# EAGLE board CrimeaLight (EAGLE 8.2.0)
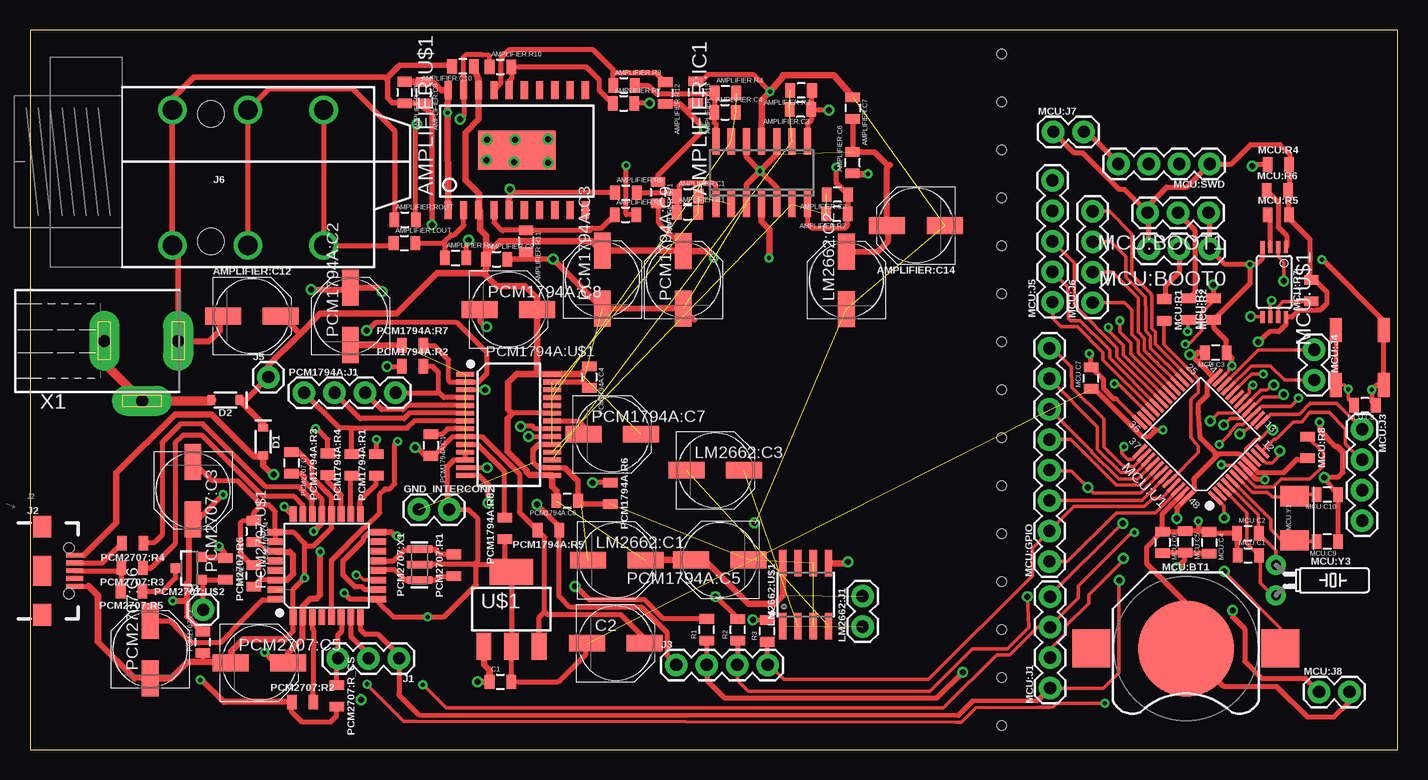
[diagram p0: board, top side]
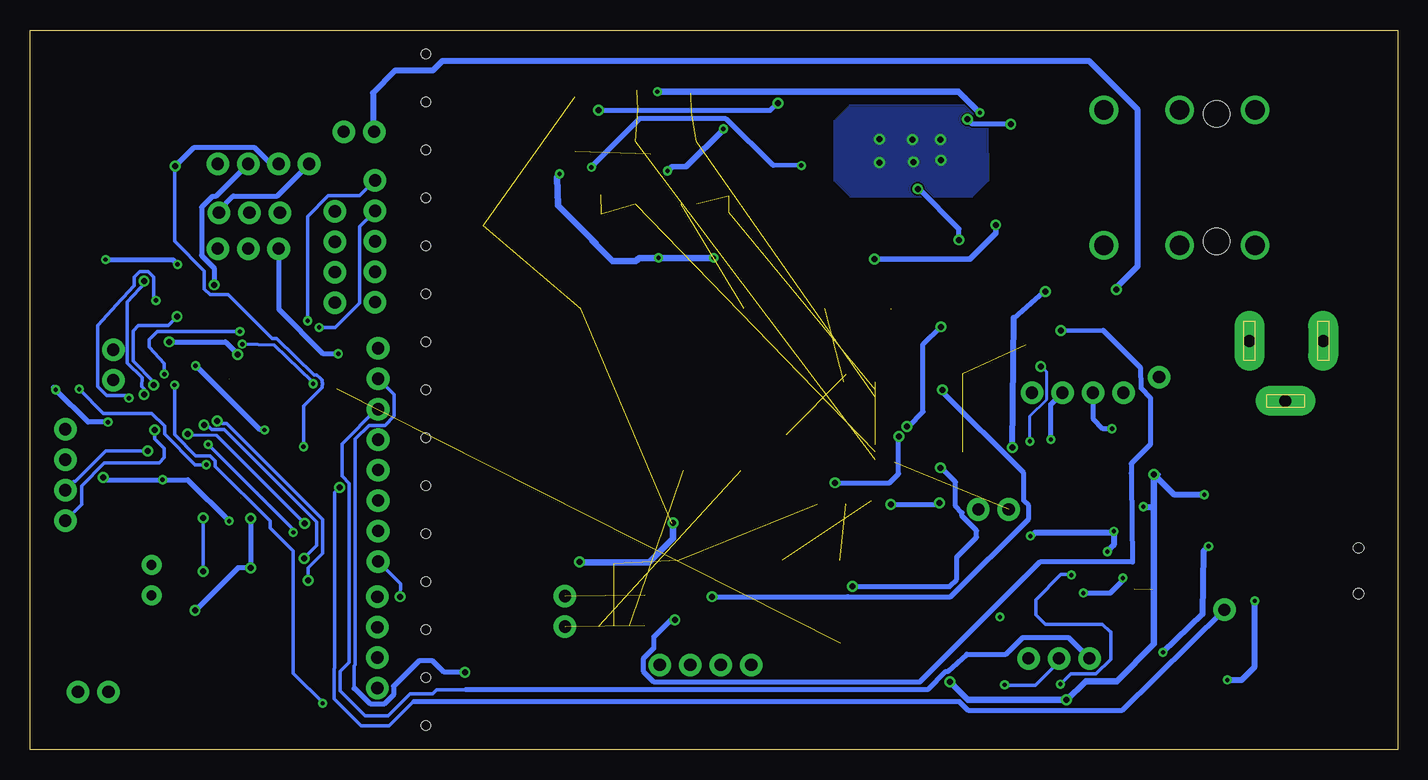
[diagram p1: board, bottom side, seen from below]

Size 114 x 60 mm. Coordinates in mm from the lower left corner, seen from the top.
Outline: 0,0 114,0 114,60 0,60 0,0
Copper layers (1*16): Top 0.035mm / dielectric 1.5mm / Bottom 0.035mm
Design rules "default *": minimum track width 0.3mm, minimum drill 0.3mm, track to track 0.1mm, track to pad 0.1mm, pad to pad 0.1mm, via to via 0.1mm, smd to smd 0.1mm, copper to edge 2mm, drill to drill 8mil, minimum pad ring 10mil, minimum via ring 8mil, stop-mask expansion 4mil, vias tented up to drill 0mil, thermal gap 10mil
Net classes: 0 default: width 0.3 mm; 1 GND: width 0.4 mm, drill 0.6 mm; 2 DGND: width 0.4 mm, drill 0.4 mm; 3 POWER: width 0.4 mm, drill 0.6 mm
Holes 0.8 mm at 81,2 81,6 81,10 81,14 81,18 81,22 81,26 81,30 81,34 81,38 81,42 81,46 81,50 81,54 81,58

## Footprints (pad centres in the part's own frame; a part is rotated, then mirrored left to right if it is on the bottom)
0805 = smd 0.8 x 1.2: 1 -0.9,0; 2 0.9,0
PANASONIC_D = smd 3 x 1.4: + 2.4,0; - -2.4,0
SO14 = smd 0.6 x 2.2: 1 -3.81,-2.6; 2 -2.54,-2.6; 3 -1.27,-2.6; 4 0,-2.6; 5 1.27,-2.6; 6 2.54,-2.6; 7 3.81,-2.6; 8 3.81,2.6; 9 2.54,2.6; 10 1.27,2.6; 11 0,2.6; 12 -1.27,2.6; 13 -2.54,2.6; 14 -3.81,2.6
SOIC20S = smd 0.6 x 1.5: 1 -5.715,-5; 2 -4.445,-5; 3 -3.175,-5; 4 -1.905,-5; 5 -0.635,-5; 6 0.635,-5; 7 1.905,-5; 8 3.175,-5; 9 4.445,-5; 10 5.715,-5; 11 5.715,5; 12 4.445,5; 13 3.175,5; 14 1.905,5; 15 0.635,5; 16 -0.635,5; 17 -1.905,5; 18 -3.175,5; 19 -4.445,5; 20 -5.715,5 | smd 6.452 x 3.251: P$1 0,0
SOD-323 = smd 0.63 x 0.83: A 1.15,0; C -1.15,0
1X02 = drill 1.016 pad 1.88: 1 0,0; 2 2.54,0
1X03 = drill 1.016 pad 1.88: 1 0,0; 2 2.54,0; 3 5.08,0
USB-AB-MICRO-SMD = smd 1.4 x 0.4: D+1 2.7,0; D-1 2.7,0.65; GND1 2.7,-1.3; ID1 2.7,-0.65; VBUS1 2.7,1.3 | smd 1.5 x 1.8: SHLD1 0,-3.68; SHLD2 0,3.68 | smd 1.5 x 2.5: SHLD3 0,0 | hole 0.85: 2.2,1.9; 2.2,-1.9
1X04 = drill 1.016 pad 1.88: 1 0,0; 2 2.54,0; 3 5.08,0; 4 7.62,0
1X01 = drill 1.016 pad 1.88: 1 0,0
AUDIO_JACK_0.25"_TRS_PTH_RA = drill 1.6: RING 10.5,-6.95; RING-NORM 10.5,4.35; SLEEVE 4.2,-6.95; SLEEVE-NORM 4.2,4.35; TIP 16.8,-6.95; TIP-NORM 16.8,4.35 | hole 2.2: 7.4,4; 7.4,-6.6
SOIC-8 = smd 0.61 x 2.21: 1 -1.905,-2.616; 2 -0.635,-2.616; 3 0.635,-2.616; 4 1.905,-2.616; 5 1.905,2.616; 6 0.635,2.616; 7 -0.635,2.616; 8 -1.905,2.616
BATTCON_12MM = smd 8 x 8: GND 0,0 | smd 3.175 x 3.175: PWR@1 -7.874,0; PWR@2 7.874,0
1X08 = drill 1.016 pad 1.88: 1 0,0; 2 2.54,0; 3 5.08,0; 4 7.62,0; 5 10.16,0; 6 12.7,0; 7 15.24,0; 8 17.78,0
1X05 = drill 1.016 pad 1.88: 1 0,0; 2 2.54,0; 3 5.08,0; 4 7.62,0; 5 10.16,0
LQFP48-0.5-7X7MM = smd 1.5 x 0.3: 1 -4.45,2.75; 2 -4.45,2.25; 3 -4.45,1.75; 4 -4.45,1.25; 5 -4.45,0.75; 6 -4.45,0.25; 7 -4.45,-0.25; 8 -4.45,-0.75; 9 -4.45,-1.25; 10 -4.45,-1.75; 11 -4.45,-2.25; 12 -4.45,-2.75; 25 4.45,-2.75; 26 4.45,-2.25; 27 4.45,-1.75; 28 4.45,-1.25; 29 4.45,-0.75; 30 4.45,-0.25; 31 4.45,0.25; 32 4.45,0.75; 33 4.45,1.25; 34 4.45,1.75; 35 4.45,2.25; 36 4.45,2.75 | smd 0.3 x 1.5: 13 -2.75,-4.45; 14 -2.25,-4.45; 15 -1.75,-4.45; 16 -1.25,-4.45; 17 -0.75,-4.45; 18 -0.25,-4.45; 19 0.25,-4.45; 20 0.75,-4.45; 21 1.25,-4.45; 22 1.75,-4.45; 23 2.25,-4.45; 24 2.75,-4.45; 37 2.75,4.45; 38 2.25,4.45; 39 1.75,4.45; 40 1.25,4.45; 41 0.75,4.45; 42 0.25,4.45; 43 -0.25,4.45; 44 -0.75,4.45; 45 -1.25,4.45; 46 -1.75,4.45; 47 -2.25,4.45; 48 -2.75,4.45
TSSOP8 = smd 0.35 x 1: 1 -0.975,-2.925; 2 -0.325,-2.925; 3 0.325,-2.925; 4 0.975,-2.925; 5 0.975,2.925; 6 0.325,2.925; 7 -0.325,2.925; 8 -0.975,2.925
PUSHBUTTON_4X4 = smd 1 x 2: P$1 2,2.3; P$2 2,-2.3; P$3 -2,-2.3; P$4 -2,2.3
CRYSTAL-TXC-7A = smd 1.7 x 2.4: P$1 1.85,0; P$2 -1.85,0
CRYSTAL-PTH-2X6-CYL-KIT = drill 0.813 pad 1.676: 1 -1.27,0; 2 1.27,0
SSOP28-0.65-10.2X5.2MM = smd 0.4 x 1.5: 1 -4.225,-3.625; 2 -3.575,-3.625; 3 -2.925,-3.625; 4 -2.275,-3.625; 5 -1.625,-3.625; 6 -0.975,-3.625; 7 -0.325,-3.625; 8 0.325,-3.625; 9 0.975,-3.625; 10 1.625,-3.625; 11 2.275,-3.625; 12 2.925,-3.625; 13 3.575,-3.625; 14 4.225,-3.625; 15 4.225,3.625; 16 3.575,3.625; 17 2.925,3.625; 18 2.275,3.625; 19 1.625,3.625; 20 0.975,3.625; 21 0.325,3.625; 22 -0.325,3.625; 23 -0.975,3.625; 24 -1.625,3.625; 25 -2.275,3.625; 26 -2.925,3.625; 27 -3.575,3.625; 28 -4.225,3.625
TQFP32-0.8-7X7MM = smd 1.27 x 0.559: 1 -4.293,2.8; 2 -4.293,2; 3 -4.293,1.2; 4 -4.293,0.4; 5 -4.293,-0.4; 6 -4.293,-1.2; 7 -4.293,-2; 8 -4.293,-2.8; 17 4.293,-2.8; 18 4.293,-2; 19 4.293,-1.2; 20 4.293,-0.4; 21 4.293,0.4; 22 4.293,1.2; 23 4.293,2; 24 4.293,2.8 | smd 0.559 x 1.27: 9 -2.8,-4.293; 10 -2,-4.293; 11 -1.2,-4.293; 12 -0.4,-4.293; 13 0.4,-4.293; 14 1.2,-4.293; 15 2,-4.293; 16 2.8,-4.293; 25 2.8,4.293; 26 2,4.293; 27 1.2,4.293; 28 0.4,4.293; 29 -0.4,4.293; 30 -1.2,4.293; 31 -2,4.293; 32 -2.8,4.293
SOT23-3 = smd 0.8 x 0.9: 1 -0.95,-1; 2 0.95,-1; 3 0,1.1
RESONATOR-SMD-3.2X1.3 = smd 0.61 x 2.184: 1 -1.283,-0.006; 2 0,0; 3 1.27,-0.006
SOT223 = smd 1.219 x 2.235: 1 -2.311,-3.099; 2 0,-3.099; 3 2.311,-3.099 | smd 3.6 x 2.2: 4 0,3.099
733980-62 = drill 1 pad 2.5 long: 1 0,8.57; 2 0,2.42; 3 5,5.57

## Placement (x,y rotation side)
AMPLIFIER:C1  2.7nF  [0805]  54.83,46.13 0 top
AMPLIFIER:C2  2.7nF  [0805]  67.3,46.27 180 top
AMPLIFIER:C3  2.7nF  [0805]  64.23,53.37 180 top
AMPLIFIER:C4  2.7nF  [0805]  57.94,53.13 0 top
AMPLIFIER:C5  0.1uF  [0805]  31.23,54.79 270 top
AMPLIFIER:C6  0.1uF  [0805]  68.56,48.94 90 top
AMPLIFIER:C7  0.1uF  [0805]  68.59,53.49 270 top
AMPLIFIER:C8  10uF  [0805]  32.79,54.77 270 top
AMPLIFIER:C9  0.1uF  [0805]  38.9,40.89 0 top
AMPLIFIER:C10  10uF  [0805]  36.09,56.97 180 top
AMPLIFIER:C11  0.1uF  [0805]  52.35,46.45 270 top
AMPLIFIER:C12  10uF  [PANASONIC_D]  18.5,36.15 0 top
AMPLIFIER:C13  0.1uF  [0805]  55.5,54.8 270 top
AMPLIFIER:C14  10uF  [PANASONIC_D]  73.85,43.7 180 top
AMPLIFIER:IC1  OPA4134D  [SO14]  60.99,48.1 0 top
AMPLIFIER:LOUT  37,8  [0805]  31.21,42.23 0 top
AMPLIFIER:R1  1K  [0805]  54.82,44.79 0 top
AMPLIFIER:R2  1K  [0805]  67.26,44.66 180 top
AMPLIFIER:R3  1K  [0805]  64.29,54.96 180 top
AMPLIFIER:R4  1K  [0805]  57.98,54.74 0 top
AMPLIFIER:R5  1K  [0805]  49.65,44.59 0 top
AMPLIFIER:R6  1K  [0805]  49.67,46.44 0 top
AMPLIFIER:R7  1K  [0805]  49.49,53.89 0 top
AMPLIFIER:R8  1K  [0805]  49.51,55.39 0 top
AMPLIFIER:R9  1K  [0805]  35.48,40.99 0 top
AMPLIFIER:R10  1K  [0805]  39.21,56.93 0 top
AMPLIFIER:R11  1K  [0805]  41.35,42.4 270 top
AMPLIFIER:R12  1K  [0805]  52.95,54.75 270 top
AMPLIFIER:ROUT  37,8  [0805]  31.26,44.18 0 top
AMPLIFIER:U$1  TPA6120A2  [SOIC20S]  40.58,49.99 0 top
C1  1.5uF  [0805]  39.21,5.65 0 top
C2  220uF  [PANASONIC_D]  48.82,8.87 0 top
D1  0.5A/20V/420mV  [SOD-323]  19.45,25.67 270 top
D2  1A/20V/420mV  [SOD-323]  16.29,29.15 180 top
GND_INTERCONN  GNDCONNECTOR  [1X02]  32.41,20.02 0 top
J1  SPI  [1X03]  30.76,7.6 180 top
J2  USB_MICRO  [USB-AB-MICRO-SMD]  1.04,14.91 0 top
J3  SWITCHERS  [1X04]  53.88,7.05 0 top
J4  PULLUP_HANDLE  [1X01]  14.43,11.65 0 top
J5  V+  [1X01]  19.87,31.05 0 top
J6  HEADPHONES  [AUDIO_JACK_0.25"_TRS_PTH_RA]  7.67,48.99 0 top
LM2662:C1  150nF  [PANASONIC_D]  48.9,15.79 0 top
LM2662:C2  47uF  [PANASONIC_D]  68.06,39.14 90 top
LM2662:C3  47uF  [PANASONIC_D]  57.13,23.29 0 top
LM2662:J1  20/150Khz  [1X02]  69.4,10.25 90 top
LM2662:U$1  LM2662  [SOIC-8]  64.66,12.91 0 top
MCU:BOOT0  [1X03]  98.35,41.76 180 top
MCU:BOOT1  [1X03]  98.25,44.76 180 top
MCU:BT1  [BATTCON_12MM]  96.36,8.43 180 top
MCU:C1  22pF  [0805]  101.55,16.19 0 top
MCU:C2  22pF  [0805]  101.54,18.04 0 top
MCU:C3  1uF  [0805]  98.84,33.1 180 top
MCU:C4  1uF  [0805]  98.3,17.25 270 top
MCU:C5  1uF  [0805]  96.3,17.31 270 top
MCU:C6  1uF  [0805]  94.4,17.27 270 top
MCU:C7  1uF  [0805]  88.45,30.97 90 top
MCU:C8  22pF  [0805]  111.29,28.7 180 top
MCU:C9  22pF  [0805]  108.15,17.35 180 top
MCU:C10  22pF  [0805]  108.14,21.26 180 top
MCU:GPIO  GPIO  [1X08]  84.98,15.68 90 top
MCU:J1  SPI1  [1X04]  85.04,5.12 90 top
MCU:J3  USART2  [1X04]  111.06,26.71 270 top
MCU:J4  I2C_2  [1X02]  107.06,33.34 270 top
MCU:J5  USART1  [1X05]  85.24,37.3 90 top
MCU:J6  SPI2  [1X04]  88.59,37.26 90 top
MCU:J7  POWER  [1X02]  85.31,51.51 0 top
MCU:J8  POWER  [1X02]  107.46,4.81 0 top
MCU:R1  100K  [0805]  94.54,36.66 270 top
MCU:R2  100K  [0805]  96.59,36.72 270 top
MCU:R3  10K  [0805]  98.66,36.72 90 top
MCU:R4  10K  [0805]  104.06,48.79 0 top
MCU:R5  100K  [0805]  104.05,44.59 0 top
MCU:R6  100K  [0805]  103.99,46.64 0 top
MCU:R7  100K  [0805]  106.81,38.28 90 top
MCU:R8  100K  [0805]  106.49,25.18 270 top
MCU:SWD  DEBUG  [1X04]  98.35,48.83 180 top
MCU:U1  STM32F103CBT6-LQFP48  [LQFP48-0.5-7X7MM]  97.62,26.08 135 top
MCU:U$1  M95320-D  [TSSOP8]  103.72,38.99 180 top
MCU:U$2  PUSHBUTTON  [PUSHBUTTON_4X4]  110.85,32.69 180 top
MCU:Y1  16 Mhz  [CRYSTAL-TXC-7A]  105.41,19.29 90 top
MCU:Y3  32.768kHz  [CRYSTAL-PTH-2X6-CYL-KIT]  103.87,14.12 270 top
PCM1794A:C1  0.1uF  [0805]  33.42,25.38 270 top
PCM1794A:C2  10uF  [PANASONIC_D]  26.71,36.14 90 top
PCM1794A:C3  10uF  [PANASONIC_D]  47.71,39.19 90 top
PCM1794A:C4  0.1uF  [0805]  46.62,31.06 270 top
PCM1794A:C5  10uF  [PANASONIC_D]  57.51,15.81 180 top
PCM1794A:C6  0.1uF  [0805]  44.79,20.73 180 top
PCM1794A:C7  47uF  [PANASONIC_D]  48.54,26.29 0 top
PCM1794A:C8  47uF  [PANASONIC_D]  39.89,36.69 0 top
PCM1794A:C9  10uF  [PANASONIC_D]  54.46,39.16 90 top
PCM1794A:J1  I2S  [1X04]  22.85,29.75 0 top
PCM1794A:R1  27  [0805]  28.88,23.74 90 top
PCM1794A:R2  27  [0805]  31.89,31.97 0 top
PCM1794A:R3  27  [0805]  24.83,23.79 90 top
PCM1794A:R4  27  [0805]  26.83,23.74 90 top
PCM1794A:R5  27  [0805]  43.21,18.28 180 top
PCM1794A:R6  10K  [0805]  48.37,21.36 270 top
PCM1794A:R7  100K  [0805]  31.89,33.72 0 top
PCM1794A:R8  100K  [0805]  39.58,18.44 90 top
PCM1794A:U$1  PCM1794A  [SSOP28-0.65-10.2X5.2MM]  39.91,27.07 270 top
PCM2707:C1  1uF  [0805]  18.65,14.49 90 top
PCM2707:C2  1uF  [0805]  14.4,8.95 90 top
PCM2707:C3  0.1uF  [PANASONIC_D]  13.59,21.6 270 top
PCM2707:C4  1uF  [0805]  18.65,18.19 270 top
PCM2707:C5  10uF  [PANASONIC_D]  19.12,7.24 0 top
PCM2707:C6  10uF  [PANASONIC_D]  10.01,8.34 90 top
PCM2707:C7  1uF  [0805]  21.8,23.9 270 top
PCM2707:R1  1M  [0805]  35.33,15.37 90 top
PCM2707:R2  1M  [0805]  22.72,3.97 0 top
PCM2707:R3  22  [0805]  8.51,15.15 180 top
PCM2707:R4  22  [0805]  8.56,17.2 180 top
PCM2707:R5  1.5K  [0805]  8.46,13.2 180 top
PCM2707:R6  1M  [0805]  16.3,15.06 270 top
PCM2707:R_CS  100k  [0805]  25.57,4.48 270 top
PCM2707:U$1  PCM2707  [TQFP32-0.8-7X7MM]  24.74,15.33 90 top
PCM2707:U$2  IRLML2246TRPBF  [SOT23-3]  13.29,15.11 90 top
PCM2707:X1  12MHz CSTCE12MOG52-R0  [RESONATOR-SMD-3.2X1.3]  32.48,15.42 90 top
R1  20  [0805]  56.4,10 90 top
R2  20  [0805]  59,9.99 90 top
R3  20  [0805]  61.45,9.88 90 top
U$1  LM3940IMP-3.3/NOPB  [SOT223]  40.13,11.71 0 top
X1  EXT_+5V  [733980-62]  3.77,34.07 270 top

## Library data of the parts
AMPLIFIER:C1-AMPLIFIER:C11 AMPLIFIER:C13 AMPLIFIER:LOUT AMPLIFIER:R1-AMPLIFIER:R12 AMPLIFIER:ROUT C1 C2 LM2662:C1-LM2662:C3 MCU:C1-MCU:C10 PCM1794A:C1-PCM1794A:C9 PCM2707:C1-PCM2707:C7 R1-R3 = SparkFun-Passives
AMPLIFIER:C12 AMPLIFIER:C14 = SparkFun-Capacitors; PROD_ID: CAP-12547
AMPLIFIER:IC1 = linear
AMPLIFIER:U$1 LM2662:U$1 MCU:U$1 MCU:U$2 PCM1794A:U$1 PCM2707:U$1 PCM2707:U$2 U$1 = EduAreaLib
D1 D2 = SparkFun-DiscreteSemi; PROD_ID: DIO-10955
GND_INTERCONN J1 J4 J5 LM2662:J1 MCU:J4 MCU:J5 MCU:J7 MCU:J8 = SparkFun-Connectors
J2 = SparkFun-Connectors; PROD_ID: CONN-11794
J3 MCU:J1 MCU:J3 MCU:J6 MCU:SWD PCM1794A:J1 = SparkFun-Connectors; PROD_ID: CONN-09696
J6 = SparkFun-Connectors; PROD_ID: CONN-12339; SF_ID: COM-11144
MCU:BOOT0 MCU:BOOT1 = SparkFun-Retired
MCU:BT1 = SparkFun-Batteries; PROD_ID: BATT-08044; SF_SKU: PRT-10592
MCU:GPIO = SparkFun-Connectors; PROD_ID: CONN-08438
MCU:R1-MCU:R8 PCM1794A:R1-PCM1794A:R8 PCM2707:R1-PCM2707:R6 PCM2707:R_CS = SparkFun-Resistors
MCU:U1 = Seeed-OPL-ic; MPN: STM32F103CBT6
MCU:Y1 = SparkFun-FreqCtrl
MCU:Y3 = SparkFun-Clocks; PROD_ID: XTAL-10112
PCM2707:X1 = SparkFun-Clocks; PROD_ID: XTAL-08895
X1 = con-conrad

## Nets
!MUTE!: MCU:GPIO.3 MCU:U1.43
!PCM2702_CS!: J1.3 MCU:GPIO.6 MCU:U1.40 PCM2707:R_CS.1 PCM2707:U$1.6
!PGA4311_CS!: MCU:U1.19
!RST!: J3.1 PCM1794A:R5.1 PCM1794A:U$1.14
!SSPND!: MCU:U1.18 PCM2707:U$1.11
+3.3V: C2.+ MCU:BOOT0.3 MCU:BOOT1.3 MCU:C3.2 MCU:C4.2 MCU:C5.2 MCU:C6.2 MCU:C7.2 MCU:J7.1 MCU:J8.1 MCU:R4.2 MCU:R5.2 MCU:R6.2 MCU:R7.2 MCU:R8.2 MCU:SWD.1 MCU:U1.9 MCU:U1.24 MCU:U1.36 MCU:U1.48 MCU:U$1.8 PCM1794A:C1.2 PCM1794A:C2.+ PCM1794A:R5.2 PCM1794A:U$1.9 U$1.3
AMPLIFIER:N$2: AMPLIFIER:R6.1 AMPLIFIER:R9.2 AMPLIFIER:U$1.5
AMPLIFIER:N$3: AMPLIFIER:R5.1 AMPLIFIER:R11.1 AMPLIFIER:U$1.4
AMPLIFIER:N$5: AMPLIFIER:R7.1 AMPLIFIER:R10.2 AMPLIFIER:U$1.16
AMPLIFIER:N$6: AMPLIFIER:R8.1 AMPLIFIER:R12.1 AMPLIFIER:U$1.17
AMPLIFIER:N$8: AMPLIFIER:LOUT.2 AMPLIFIER:R9.1 AMPLIFIER:U$1.2
AMPLIFIER:N$9: AMPLIFIER:R10.1 AMPLIFIER:ROUT.2 AMPLIFIER:U$1.19
AMPLIFIER:OUTA: AMPLIFIER:C1.1 AMPLIFIER:IC1.1 AMPLIFIER:R1.1 AMPLIFIER:R6.2
AMPLIFIER:OUTB: AMPLIFIER:C2.1 AMPLIFIER:IC1.7 AMPLIFIER:R2.1 AMPLIFIER:R5.2
AMPLIFIER:OUTC: AMPLIFIER:C3.1 AMPLIFIER:IC1.8 AMPLIFIER:R3.1 AMPLIFIER:R7.2
AMPLIFIER:OUTD: AMPLIFIER:C4.1 AMPLIFIER:IC1.14 AMPLIFIER:R4.1 AMPLIFIER:R8.2
CHSL: PCM1794A:R7.2 PCM1794A:U$1.2 R3.2
DEM: PCM1794A:U$1.3 R2.2
DGND [GND]: C1.2 C2.- GND_INTERCONN.2 J2.GND1 MCU:BOOT0.1 MCU:BOOT1.1 MCU:BT1.GND MCU:C1.1 MCU:C2.1 MCU:C3.1 MCU:C4.1 MCU:C5.1 MCU:C6.1 MCU:C7.1 MCU:C8.1 MCU:C9.1 MCU:C10.1 MCU:J7.2 MCU:J8.2 MCU:R3.1 MCU:SWD.4 MCU:U1.8 MCU:U1.23 MCU:U1.35 MCU:U1.47 MCU:U$1.4 MCU:U$2.P$3 MCU:U$2.P$4 PCM1794A:C1.1 PCM1794A:C2.- PCM1794A:R7.1 PCM1794A:R8.1 PCM1794A:U$1.1 PCM1794A:U$1.8 PCM1794A:U$1.11 PCM1794A:U$1.12 PCM2707:C1.2 PCM2707:C2.1 PCM2707:C3.- PCM2707:C4.1 PCM2707:C5.- PCM2707:C6.- PCM2707:C7.1 PCM2707:U$1.1 PCM2707:U$1.9 PCM2707:U$1.20 PCM2707:U$1.25 PCM2707:U$1.26 PCM2707:U$1.31 PCM2707:X1.2 U$1.2 U$1.4
EXT+5V: D2.A X1.2 X1.3
GND [GND]: AMPLIFIER:C5.2 AMPLIFIER:C6.2 AMPLIFIER:C7.2 AMPLIFIER:C8.2 AMPLIFIER:C9.2 AMPLIFIER:C10.2 AMPLIFIER:C11.1 AMPLIFIER:C12.- AMPLIFIER:C13.2 AMPLIFIER:C14.+ AMPLIFIER:IC1.3 AMPLIFIER:IC1.5 AMPLIFIER:IC1.10 AMPLIFIER:IC1.12 AMPLIFIER:R11.2 AMPLIFIER:R12.2 GND_INTERCONN.1 J6.SLEEVE J6.SLEEVE-NORM LM2662:C1.- LM2662:C2.+ LM2662:U$1.3 LM2662:U$1.6 PCM1794A:C3.- PCM1794A:C4.2 PCM1794A:C5.- PCM1794A:C6.1 PCM1794A:C9.- PCM1794A:R6.2 PCM1794A:U$1.16 PCM1794A:U$1.19 PCM1794A:U$1.24 PCM1794A:U$1.27 X1.1
LM2662:FC: LM2662:J1.1 LM2662:U$1.1
LM2662:N$1: LM2662:C3.+ LM2662:U$1.2
LM2662:N$2: LM2662:C3.- LM2662:U$1.4
MCU:!EEPROM_CS!: MCU:R6.1 MCU:U$1.1
MCU:!EEPROM_HOLD!: MCU:R7.1 MCU:U$1.7
MCU:!RST!: MCU:C8.2 MCU:R8.1 MCU:U1.7 MCU:U$2.P$1 MCU:U$2.P$2
MCU:!W!: MCU:R5.1 MCU:U$1.3
MCU:I2C2_SCL: MCU:J4.2 MCU:U1.21
MCU:I2C2_SDA: MCU:J4.1 MCU:U1.22
MCU:N$1: MCU:BT1.PWR@1 MCU:U1.1
MCU:N$2: MCU:C10.2 MCU:U1.6 MCU:Y1.P$1
MCU:N$3: MCU:C9.2 MCU:U1.5 MCU:Y1.P$2
MCU:N$4: MCU:C2.2 MCU:U1.4 MCU:Y3.1
MCU:N$5: MCU:C1.2 MCU:U1.3 MCU:Y3.2
MCU:N$6: MCU:J5.3 MCU:U1.31
MCU:N$7: MCU:BOOT0.2 MCU:R1.1
MCU:N$8: MCU:R1.2 MCU:U1.44
MCU:N$9: MCU:J5.2 MCU:U1.32
MCU:N$10: MCU:BOOT1.2 MCU:R2.1
MCU:N$11: MCU:R2.2 MCU:U1.20
MCU:N$12: MCU:J5.1 MCU:U1.33
MCU:N$14: MCU:J5.4 MCU:U1.30
MCU:N$15: MCU:J5.5 MCU:U1.29
MCU:PA15: MCU:GPIO.8 MCU:U1.38
MCU:SPI1_MISO: MCU:J1.2 MCU:U1.16 MCU:U$1.2
MCU:SPI1_NSS: MCU:J1.4 MCU:U1.14
MCU:SPI2_MISO: MCU:J6.2 MCU:U1.27
MCU:SPI2_MOSI: MCU:J6.1 MCU:U1.28
MCU:SPI2_NSS: MCU:J6.4 MCU:U1.25
MCU:SPI2_SCK: MCU:J6.3 MCU:U1.26
MCU:SWDCLK: MCU:R4.1 MCU:SWD.3 MCU:U1.37
MCU:SWDIO: MCU:R3.2 MCU:SWD.2 MCU:U1.34
MCU:USART2_CTS: MCU:J3.4 MCU:U1.10
MCU:USART2_RTS: MCU:J3.3 MCU:U1.11
MCU:USART2_RX: MCU:J3.1 MCU:U1.13
MCU:USART2_TX: MCU:J3.2 MCU:U1.12
MCU:ZERO: MCU:U1.2
N$1: J2.D-1 PCM2707:R4.2
N$2: J2.D+1 PCM2707:R3.2 PCM2707:R5.2
N$3: AMPLIFIER:C1.2 AMPLIFIER:IC1.2 AMPLIFIER:R1.2 PCM1794A:U$1.26
N$4: AMPLIFIER:LOUT.1 J6.TIP J6.TIP-NORM
N$5: PCM1794A:R4.1 PCM2707:U$1.18
N$6: PCM1794A:R2.1 PCM2707:U$1.5
N$7: PCM1794A:R3.1 PCM2707:U$1.19
N$8: PCM1794A:R1.1 PCM2707:U$1.17
N$9: AMPLIFIER:ROUT.1 J6.RING J6.RING-NORM
N$10: AMPLIFIER:C4.2 AMPLIFIER:IC1.13 AMPLIFIER:R4.2 PCM1794A:U$1.25
N$11: J3.2 MCU:GPIO.7 MCU:U1.39 R1.1
N$12: J3.3 MCU:GPIO.1 MCU:U1.46 R2.1
N$13: J3.4 MCU:GPIO.2 MCU:U1.45 R3.1
N$14: AMPLIFIER:C2.2 AMPLIFIER:IC1.6 AMPLIFIER:R2.2 PCM1794A:U$1.18
N$15: AMPLIFIER:C3.2 AMPLIFIER:IC1.9 AMPLIFIER:R3.2 PCM1794A:U$1.17
PCM1794A:BCK_INT: PCM1794A:J1.2 PCM1794A:R3.2 PCM1794A:U$1.6
PCM1794A:DATA_INT: PCM1794A:J1.3 PCM1794A:R1.2 PCM1794A:U$1.5
PCM1794A:LRCK_INT: PCM1794A:J1.4 PCM1794A:R2.2 PCM1794A:U$1.4
PCM1794A:MUTE: PCM1794A:R8.2 PCM1794A:U$1.10
PCM1794A:N$4: PCM1794A:R6.1 PCM1794A:U$1.20
PCM1794A:N$9: PCM1794A:C7.- PCM1794A:U$1.22
PCM1794A:N$10: PCM1794A:C8.- PCM1794A:U$1.21
PCM1794A:SCK_INT: PCM1794A:J1.1 PCM1794A:R4.2 PCM1794A:U$1.7
PCM2707:DIN: PCM2707:U$1.4
PCM2707:INT_3.3V: PCM2707:C5.+ PCM2707:C7.2 PCM2707:R6.1 PCM2707:U$1.2 PCM2707:U$1.10 PCM2707:U$1.16 PCM2707:U$1.21 PCM2707:U$2.2
PCM2707:INTRNL_D+: PCM2707:R3.1 PCM2707:U$1.23
PCM2707:INTRNL_D-: PCM2707:R4.1 PCM2707:U$1.22
PCM2707:INTRNL_HOST: PCM2707:R2.2 PCM2707:U$1.3
PCM2707:N$2: PCM2707:C1.1 PCM2707:C4.2 PCM2707:U$1.27 PCM2707:U$1.30
PCM2707:N$9: PCM2707:R5.1 PCM2707:U$2.3
PCM2707:RESONATOR_XTI: PCM2707:R1.1 PCM2707:U$1.12 PCM2707:X1.1
PCM2707:RESONATOR_XTO: PCM2707:R1.2 PCM2707:U$1.13 PCM2707:X1.3
PCM2707:VCOM: PCM2707:C6.+ PCM2707:U$1.32
PULLUP_D+: J4.1 MCU:GPIO.4 MCU:U1.42 PCM2707:R6.2 PCM2707:U$2.1
SPI_MOSI: J1.1 MCU:J1.1 MCU:U1.17 MCU:U$1.5 PCM2707:U$1.8
SPI_SCK: J1.2 MCU:J1.3 MCU:U1.15 MCU:U$1.6 PCM2707:U$1.7
USB+5V [POWER]: C1.1 D1.A J2.VBUS1 PCM2707:C2.2 PCM2707:C3.+ PCM2707:R2.1 PCM2707:R_CS.2 PCM2707:U$1.24 U$1.1
V+ [POWER]: AMPLIFIER:C6.1 AMPLIFIER:C9.1 AMPLIFIER:C10.1 AMPLIFIER:C11.2 AMPLIFIER:C12.+ AMPLIFIER:IC1.4 AMPLIFIER:U$1.3 AMPLIFIER:U$1.18 D1.C D2.C J5.1 LM2662:C1.+ LM2662:J1.2 LM2662:U$1.8 PCM1794A:C3.+ PCM1794A:C4.1 PCM1794A:C5.+ PCM1794A:C6.2 PCM1794A:C7.+ PCM1794A:C8.+ PCM1794A:C9.+ PCM1794A:U$1.15 PCM1794A:U$1.23 PCM1794A:U$1.28
V- [POWER]: AMPLIFIER:C5.1 AMPLIFIER:C7.1 AMPLIFIER:C8.1 AMPLIFIER:C13.1 AMPLIFIER:C14.- AMPLIFIER:IC1.11 AMPLIFIER:U$1.1 AMPLIFIER:U$1.20 LM2662:C2.- LM2662:U$1.5
ZCEN: MCU:GPIO.5 MCU:U1.41
ZERO: PCM1794A:U$1.13 R1.2

## Tracks (layer width: path | path; a pad name or v marks a point on that pad's centre or on a via)
!MUTE!
  Top 0.305: MCU:GPIO.3 92.68,20.76 94.65,22.73 MCU:U1.43
!PCM2702_CS!
  Top 0.305: MCU:U1.40 93.59,23.79 92.35,22.55 90.76,22.55 88.48,24.83 88.48,24.88 MCU:GPIO.6
  Top 0.406: PCM2707:U$1.6 26,10.98 26,9.9 25.68,9.58 J1.3 25.57,7.49 PCM2707:R_CS.1
  Bottom 0.305: 77.65,5 80.1,5 80.44,4.66 82.29,4.66 84.15,2.8 86.05,2.8 88.14,4.89 88.14,6.54 87.39,7.29 87.39,22.18 88,22.79 88,25.5 85.12,28.38 MCU:GPIO.6
  Bottom 0.406: 77.65,5 39.17,5 37.66,6.51 37.49,6.51 35.9,7.95 32.65,7.95 31.25,9.35 27.43,9.35 J1.3
!RST!  (via drill 0.5)
  Top 0.406: 42.2,20.5 v42.25,20.45 44.11,18.59 PCM1794A:R5.1 44.1,12.8 45.04,11.86 51.01,11.86 53.13,9.74 53.13,7.8 J3.1 | v38.2,20.55 38.2,22.1 37.45,22.85 PCM1794A:U$1.14
  Bottom 0.406: v42.25,20.45 38.15,20.45 38.15,20.5 v38.2,20.55
!SSPND!  (via drill 0.35)
  Top 0.305: MCU:U1.18 101.65,29.75 101.65,30.2 101.9,30.45 v101.95,30.4 | v89.6,3.85 85.6,3.85 85.3,3.54 85.06,3.54 84.02,3.54 78.83,3.49 77.96,2.62 | 77.96,2.62 | 77.96,2.62 77.8,2.45 77.63,2.29 77.4,2.29 77.17,2.29 32.17,2.34 31.16,2.34 28.05,5.45 v28.1,5.45 | PCM2707:U$1.11 27.82,14.13 27.35,14.6 27.25,14.6 v27.2,14.55
  Bottom 0.305: v101.95,30.4 101.95,26.26 100.18,24.48 99,24.48 98.57,24.05 98.57,23.62 94,19.05 94,18.5 92.05,16.55 92.05,6.35 89.5,3.8 89.55,3.8 v89.6,3.85 | v28.1,5.45 27.25,6.3 25.14,6.3 23.92,7.53 23.92,9.8 23.95,9.8 24.6,10.45 29.35,10.45 30.15,11.25 30.15,12.5 28.05,14.6 27.25,14.6 v27.2,14.55
+3.3V  (via drill 0.35, 0.5)  (1 unrouted)
  Top 0.3: 98.57,31.12 MCU:U1.24 | MCU:U1.36 90.55,29.25
  Top 0.305: 107.3,36.63 107.56,36.63 | MCU:U1.24
  Top 0.4: v32.1,25.2 32.05,25.45 32,25.45 32.97,24.48 PCM1794A:C1.2 33.63,24.48 35.24,26.09 PCM1794A:U$1.9 37.7,26.09 40.8,23 40.8,19.79 PCM1794A:R5.2 42.9,17.69 42.9,11.5 | U$1.3 42.44,11.04 42.9,11.5 | C2.+ 51.22,9.28 49.25,11.25 43.15,11.25 42.9,11.5 | MCU:U1.48 96.42,20.97 95.6,20.15 v95.6,19.27 95.6,18.97 | 95.8,15.35 v95.6,15.15 | 95.8,15.35 96.25,15.8 96.25,16.36 MCU:C5.2 | MCU:C5.2 94.44,16.41 MCU:C6.2 | MCU:C5.2 98.24,16.41 MCU:C4.2 | 95.95,15.2 95.8,15.35 | v100.25,11.6 100.25,11.05 101.25,10.05 101.25,7.35 102.65,5.95 106.32,5.95 MCU:J8.1 | MCU:BOOT1.3 91.23,46.7 90.8,46.7 87.75,49.75 87.07,49.75 MCU:J7.1 | MCU:BOOT1.3 93.17,45.32 94.75,46.9 96.42,46.9 MCU:SWD.1 100.13,48.83 101.75,50.45 104.2,50.45 105,49.65 105,48.83 MCU:R4.2 104.96,46.71 MCU:R6.2 104.89,44.65 MCU:R5.2 104.95,44.3 106.7,42.55 106.7,39.29 MCU:R7.2 107.07,39.18 108.1,38.15 108.1,37.17 107.56,36.63 107.25,36.63 107.25,36.62 106.06,36.62 106.04,36.65 105.75,36.65 105.17,36.06 MCU:U$1.8 104.69,35.45 104.1,34.85 103.35,34.85 v102.4,34 | MCU:BOOT0.3 93.27,44.66 MCU:BOOT1.3 | 98.57,31.12 97.85,31.85 97.15,32.55 96.96,32.72 v96.7,32.95 | 106.73,36.63 107.3,36.63 | 106.59,24.35 MCU:R8.2 106.52,24.2 105.6,24.2 104.5,23.1 102.35,23.1 101.65,23.8 MCU:U1.9 101.63,23.82 100.8,24.65 99.1,24.65 98.83,24.38 | 98.83,24.38 97,22.55 97,21.97 97.06,21.91 97.06,21.59 96.44,20.97 | 98.83,24.38 98.83,24.73 97.55,26 97.4,28.16 97.42,28.15 97.42,28.82 98.15,29.55 98.15,30.5 98.19,30.54 98.45,30.8 MCU:U1.24 | v88.3,33 88.35,32.95 88.35,32.9 88.45,32.8 MCU:C7.2 89.5,30.82 89.5,30.1 90.35,29.25 90.55,29.25
  Top 0.45: MCU:C3.2 97.34,33.1 96.96,32.72
  Top 0.508: v23.45,38.35 26.52,38.35 PCM1794A:C2.+ 29.01,38.54 v29.35,38.2
  Bottom 0.4: 32,36 29.5,38.2 | 29.55,38.15 29.5,38.2 | 29.5,38.2 v29.35,38.2 | v95.6,19.27 v95.6,15.15 96.65,15.15 100.2,11.6 v100.25,11.6 | v96.7,32.95 96.7,33 97.7,34 v102.4,34 | 85.4,51.6 MCU:J7.1 | v88.3,33 89.55,33 93.25,36.7 93.25,41.74 MCU:BOOT0.3
  Bottom 0.5: v32.1,25.2 32,36 | v23.45,38.35 23.4,38.55 21.65,40.3 21.65,53.35 25.7,57.4 79.63,57.4 80.42,56.61 83.54,56.61 85.4,54.75 85.4,51.6
AMPLIFIER:N$2  (via drill 0.5)
  Top 0.406: AMPLIFIER:R6.1 40.29,46.44 39.9,46.05 39.9,45.55 | 39.9,45.55 39.9,45.03 AMPLIFIER:U$1.5 | AMPLIFIER:R9.2 36.38,42.18 36.6,42.4 36.6,42.45 v36.55,42.5 | v40,46.75 39.95,45.6 39.9,45.55
  Bottom 0.406: v36.55,42.5 36.55,43.4 39.85,46.75 v40,46.75
AMPLIFIER:N$3
  Top 0.406: AMPLIFIER:U$1.4 38.67,43.98 39.4,43.25 39.45,43.3 AMPLIFIER:R11.1 46.55,43.3 46.59,43.25 46.84,43.5 47.66,43.5 AMPLIFIER:R5.1
AMPLIFIER:N$5
  Top 0.406: AMPLIFIER:U$1.16 39.95,55.74 40.2,56 40.2,56.84 AMPLIFIER:R10.2 46.37,56.93 47.45,55.85 47.45,54.98 48.04,54.38 48.2,54.23 AMPLIFIER:R7.1
AMPLIFIER:N$6
  Top 0.406: AMPLIFIER:R8.1 48.61,56.45 | 48.61,56.45 48.61,56.69 46.95,58.35 39.95,58.35 39.24,57.63 39.24,55.55 AMPLIFIER:U$1.17 | 48.61,56.45 52.15,56.45 AMPLIFIER:R12.1
AMPLIFIER:N$8
  Top 0.406: 34.58,42.38 AMPLIFIER:R9.1 | 34.58,42.38 35.1,42.9 35.35,42.9 36.15,43.7 36.15,44.98 AMPLIFIER:U$1.2 | AMPLIFIER:LOUT.2 34.43,42.23 34.58,42.38
AMPLIFIER:N$9  (via drill 0.5)
  Top 0.406: AMPLIFIER:R10.1 38.31,57.79 38.2,57.9 37.73,57.93 36.32,57.93 36.08,57.69 36.08,56.15 36.13,56.1 AMPLIFIER:U$1.19 36.19,52.84 v35.85,52.55 | AMPLIFIER:ROUT.2 32.16,52.11 32.25,52.2 v32.25,52.15
  Bottom 0.406: v32.25,52.15 35.45,52.15 v35.85,52.55
AMPLIFIER:OUTA
  Top 0.406: AMPLIFIER:R6.2 53.62,46.44 AMPLIFIER:C1.1 | AMPLIFIER:C1.1 AMPLIFIER:R1.1 | AMPLIFIER:IC1.1 57.18,47.07 57,47.25 54.35,47.25 54.1,47 54.1,46.3 AMPLIFIER:C1.1
AMPLIFIER:OUTB  (via drill 0.35)
  Top 0.406: AMPLIFIER:IC1.7 64.8,43.85 65.15,43.5 67.95,43.5 68.15,43.7 AMPLIFIER:R2.1 68.2,44.7 AMPLIFIER:C2.1 67.2,47.27 v67.2,48.55 | AMPLIFIER:R5.2 50.59,44.59 49.7,44.6 v49.7,48.7
  Bottom 0.406: v49.7,48.7 52.05,48.71 55.88,52.53 55.94,52.53 56,52.6 63.2,52.6 67.15,48.65 67.15,48.6 v67.2,48.55
AMPLIFIER:OUTC  (via drill 0.5)
  Top 0.406: AMPLIFIER:C3.1 65.13,54.9 AMPLIFIER:R3.1 | AMPLIFIER:C3.1 66.43,53.37 66.45,53.35 66.55,53.35 v66.6,53.3 | v51.65,53.9 50.5,53.9 AMPLIFIER:R7.2 | AMPLIFIER:C3.1 65.13,52.48 64.8,52.15 AMPLIFIER:IC1.8
  Bottom 0.406: v66.6,53.3 52.3,53.3 51.75,53.85 51.7,53.85 v51.65,53.9
AMPLIFIER:OUTD
  Top 0.406: AMPLIFIER:IC1.14 57.2,50.72 57.2,52.15 57.04,52.31 AMPLIFIER:C4.1 57.08,53.17 AMPLIFIER:R4.1 57.04,54.7 52.2,54.7 51.51,55.39 AMPLIFIER:R8.2
CHSL  (via drill 0.5)
  Top 0.406: PCM1794A:R7.2 32.86,33.65 33.75,33.65 34.9,32.5 34.9,30.75 35.01,30.64 PCM1794A:U$1.2 37.4,30.64 38.1,31.35 38.1,33.1 35.6,35.6 28.8,35.6 28.1,34.9 v28.05,34.95 | v60.25,10.8 61.43,10.8 R3.2
  Bottom 0.406: v28.05,34.95 24.55,34.97 21.44,31.86 21.39,30.14 20.6,29.3 20.6,25.45 22.2,23.85 22.2,23.05 22.19,23.04 22.18,22.5 22.09,15.64 29.81,15.64 39.84,5.61 61.96,5.61 62.85,6.49 62.85,7.61 62.06,8.4 62,8.4 62,9.4 60.65,10.75 60.3,10.75 v60.25,10.8
DEM  (via drill 0.5)
  Top 0.406: R2.2 59,10.95 57.2,12.75 v57.15,12.75 | v37.95,30 PCM1794A:U$1.3
  Bottom 0.406: v57.15,12.75 45.82,12.75 45.81,12.74 37.26,12.74 30.75,19.25 30.75,20.33 31.16,20.74 31.16,23.06 38.1,30 v37.95,30
DGND  (via drill 0.35, 0.5)  (5 unrouted)
  Top 0.3: MCU:U1.47 96.07,21.37
  Top 0.305: MCU:U1.23 99.22,30.82 99.95,31.55 99.95,31.75 v100.2,32 | 18.61,15.39 PCM2707:C1.2 | 17.74,19.09 17.6,18.95 | MCU:U1.35 92.88,27.62 93.85,26.65
  Top 0.4: 37.05,15.42 PCM2707:X1.2 | 37.35,15.42 39.52,15.42 | 37.35,15.42 37.05,15.42 | 39.52,15.42 U$1.4 U$1.2 40.13,5.67 C1.2 44.05,5.65 46.35,7.95 46.35,8.8 C2.- | PCM2707:U$1.1 21.94,9.89 21.25,9.2 | PCM2707:C5.- 16.75,7.27 16.72,7.3 | PCM2707:C6.- 8.71,5.94 | PCM2707:U$1.25 PCM2707:U$1.26 | PCM1794A:C1.1 34.33,26.28 34.8,26.75 35.37,26.75 35.32,26.75 PCM1794A:U$1.8 | GND_INTERCONN.2 36.58,20.02 37.3,19.3 37.3,15.67 37.05,15.42 | PCM1794A:R8.1 39.58,15.48 39.52,15.42 | PCM2707:U$1.9 29.03,12.32 30.3,11.05 v33.15,11.05 34.5,11.05 37.2,13.75 37.2,15.27 37.35,15.42 | MCU:U1.47 96.07,21.32 94.4,19.65 MCU:C6.1 | MCU:C6.1 96.26,18.17 MCU:C5.1 97.4,18.21 | 97.4,18.21 98.24,18.21 MCU:C4.1 98.41,18.04 MCU:C2.1 MCU:C1.1 | MCU:C6.1 93.1,16.87 93.1,15.5 96.36,12.24 MCU:BT1.GND 99.54,5.25 103.95,5.25 106.5,2.7 108.7,2.7 110,4 MCU:J8.2 | MCU:SWD.4 90.75,48.85 88.09,51.51 MCU:J7.2 | MCU:BOOT0.1 98.35,44.66 MCU:BOOT1.1 | 109.45,24.8 109.45,23.1 109.05,22.7 v107.9,22.7 108.6,21.73 108.73,21.6 MCU:C10.1 MCU:C9.1 | 107.65,27.15 v107.5,27.3 | MCU:U1.8 102.2,22.55 102.9,22.55 v102.95,22.5 | v97.4,19.05 97.4,18.21 | MCU:C8.1 111.85,29.04 v111.85,30 112.24,30.39 MCU:U$2.P$4 MCU:U$2.P$3 112.85,35.75 107.75,40.85 v107.7,40.85 | v101.7,40.45 102.2,40.45 102.75,41 MCU:U$1.4 | J2.GND1 4.89,13.61
  Top 0.406: 19.3,20.4 19.9,20.4 20.45,19.85 PCM2707:U$1.25 20.48,18.1 22,18.1 22.9,17.2 22.9,17 | PCM2707:C3.- 15.19,22.4 17.3,22.4 19.3,20.4 | PCM2707:C2.1 14.4,7.3 | MCU:C7.1 88.73,30.07 92.7,26.1 93.3,26.1 93.85,26.65 | 93.85,26.65 93.85,26.67 | 93.85,26.65 v94.45,26.65 94.6,26.65 | v100.2,32 100.2,32.64 MCU:C3.1 99.7,33.14 99.7,34.15 98.66,35.19 MCU:R3.1 101.7,38.86 v101.7,40.45 99.66,40.45 MCU:BOOT0.1 | PCM2707:C7.1 22.4,24.8 23.5,23.7 23.5,22.7 25.14,21.06 PCM2707:U$1.20 25.15,18.5 23.65,17 22.9,17 | PCM2707:U$1.1 21.94,13.34 v22.9,14.3 22.9,17 | PCM2707:C1.2 18.46,15.39 17.55,16.3 17.55,18.9 17.6,18.95 | 17.74,19.09 PCM2707:C4.1 18.65,19.75 19.3,20.4 | PCM2707:U$1.9 26.67,12.53 26.3,12.9 26.3,12.95 v26.2,13.05 | PCM1794A:U$1.11 PCM1794A:U$1.12 35.34,24.14 34.75,23.55 34.75,20.22 GND_INTERCONN.2
  Top 0.45: 109.45,24.8 109.21,25.04 109.21,25.07 108.99,25.29 108.81,25.29 107.5,26.6 107.5,27 107.65,27.15
  Top 0.508: PCM1794A:C2.- 30.97,33.74 PCM1794A:R7.1
  Top 0.55: 21.25,9.2 17.75,9.2 16.75,8.2 16.75,7.27 | PCM2707:C6.- 11.79,5.94 13.15,7.3 14.4,7.3 16.72,7.3 | 8.71,5.94 5.65,9
  Top 0.6: 5.65,9 5.65,12.85 4.89,13.61
  Bottom 0.4: MCU:BOOT1.1 98.25,44.95 97.05,46.15 93.41,46.15 MCU:SWD.4 | v107.9,22.7 107.8,22.7 107.6,22.5 v102.95,22.5 100.85,22.5 v97.4,19.05 97.35,19 | v107.5,27.3 109.15,27.3 v111.85,30 112.05,30.2 | v107.7,40.85 102.1,40.85 v101.7,40.45 101.6,40.35
  Bottom 0.406: v94.45,26.65 94.8,26.65 100.15,32 v100.2,32 | v26.2,13.05 23.95,13.05 22.85,14.15 22.85,14.25 v22.9,14.3
EXT+5V
  Top 0.8: X1.2 6.19,32.22 X1.3 15.06,29.07 D2.A
GND  (via drill 0.35, 0.5)  (10 unrouted)
  Top 0.406: AMPLIFIER:C13.2 55.45,53.9 54.77,53.23 | AMPLIFIER:C11.1 52.35,47.9 v56.2,51.75
  Top 0.45: 41.35,40.89 AMPLIFIER:C9.2 | 41.35,40.89 v43.61,40.89 PCM1794A:C3.- 54.43,36.79 PCM1794A:C9.- 55.41,35.81 | 29.8,55.85 29.8,56.1 29.85,56.1 30.8,57.05 35.11,57.05 AMPLIFIER:C10.2 | 29.8,55.85 29.8,54.35 30.2,53.95 31.17,53.95 AMPLIFIER:C5.2 32.77,53.89 AMPLIFIER:C8.2 32.79,53.51 33.5,53.05 33.5,44.5 33.55,43.9 33.6,43.85 v33.5,43.75 | X1.1 12.34,41.57 J6.SLEEVE J6.SLEEVE-NORM 11.87,54.27 13.65,56.05 29.6,56.05 29.8,55.85 | AMPLIFIER:C7.2 68.59,49.87 | AMPLIFIER:C6.2 68.59,49.87 | 71.7,48.77 71.43,48.77 70.4,49.8 68.66,49.8 68.59,49.87 | PCM1794A:U$1.27 46.13,30.64 PCM1794A:C4.2 46.62,30.18 | PCM1794A:R6.2 45.96,20.46 PCM1794A:C6.1 45.7,22.4 44.6,23.5 PCM1794A:U$1.16 42.87,23.5 42.86,23.51 42.39,23.51 41.95,23.95 41.95,25 42.4,25.45 PCM1794A:U$1.19 | AMPLIFIER:R11.2 41.35,40.89 | AMPLIFIER:R12.2 54.15,53.85 54.77,53.23 55.8,52.2 v56.2,51.75 | AMPLIFIER:IC1.12 59.72,49.38 v60.85,48.25 | AMPLIFIER:IC1.10 62.26,49.66 v60.85,48.25 | AMPLIFIER:IC1.3 59.72,47.12 v60.85,48.25 | AMPLIFIER:IC1.5 62.26,46.84 v60.85,48.25
  Top 0.508: LM2662:C2.+ 70.69,41.54 71.55,42.4 71.55,43.6 AMPLIFIER:C14.+ 71.45,48.52 71.7,48.77 | X1.1 14.97,34.07 15.85,34.95 15.85,35.9 AMPLIFIER:C12.-
  Bottom 0.45: v33.5,43.75 33.5,43.05 35.65,40.9 43.7,40.9 43.75,40.85 43.65,40.85 v43.61,40.89 | v56.2,51.75 56.15,51.75 59.3,48.6 60.5,48.6 v60.85,48.25 61,48.1
LM2662:FC  (1 unrouted)
LM2662:N$1  (1 unrouted)
LM2662:N$2  (1 unrouted)
MCU:!EEPROM_CS!
  Top 0.406: MCU:R6.1 103.09,46.61 104.05,45.65 104.05,43.55 104.75,42.85 104.75,41.97 MCU:U$1.1
MCU:!EEPROM_HOLD!
  Top 0.3: MCU:U$1.7 104.05,36.95 104.45,37.35 106.78,37.35 MCU:R7.1
MCU:!RST!  (via drill 0.35)
  Top 0.305: v99.3,23.75 99.25,23.7 100.35,23.7 MCU:U1.7 102.15,21.9 103.65,21.9 104.3,22.55 106.7,22.55 107.8,23.65 107.8,24.77 MCU:R8.1 | MCU:U$2.P$1 109.56,30.39 v109.9,30.05 109.9,29.19 MCU:C8.2
  Top 0.406: MCU:U$2.P$2 MCU:U$2.P$1
  Bottom 0.305: v99.3,23.75 100.23,23.75 102.79,26.32 102.79,26.98 103.84,28.03 107.88,28.03 v109.9,30.05 109.85,30.05
MCU:!W!
  Top 0.406: MCU:U$1.3 103.39,44.34 MCU:R5.1
MCU:I2C2_SCL
  Top 0.3: MCU:J4.2 104.6,30.8 103.4,32 101.8,32 99.91,30.11 MCU:U1.21
MCU:I2C2_SDA
  Top 0.3: MCU:U1.22 99.56,30.46 102.4,33.3 107.02,33.3 MCU:J4.1
MCU:N$1  (via drill 0.5)
  Top 0.305: MCU:BT1.PWR@1 104.23,10.12 99.5,14.85 v99.55,14.85 | MCU:U1.1 98.82,20.98 99.5,20.3 99.5,19.35 v99.55,19.3
  Bottom 0.305: v99.55,14.85 v99.55,19.3 | v99.55,19.3 99.55,19.5 99.5,19.55 99.5,19.35 v99.55,19.3
MCU:N$2
  Top 0.3: MCU:U1.6 101.9,21.45 103.15,21.45 103.55,21.05 105.32,21.05 MCU:Y1.P$1 105.53,21.26 MCU:C10.2
MCU:N$3
  Top 0.3: MCU:U1.5 103.45,19.2 103.45,18.35 104.6,17.2 105.17,17.2 MCU:Y1.P$2 105.5,17.35 MCU:C9.2
MCU:N$4
  Top 0.305: MCU:U1.4 99.9,22.05 102.4,19.55 102.4,18.08 MCU:C2.2 103.87,16.61 MCU:Y3.1
MCU:N$5
  Top 0.305: MCU:U1.3 99.53,21.67 101.45,19.75 101.45,17.19 MCU:C1.2 102.55,16.09 102.55,13.9 103.6,12.85 MCU:Y3.2
MCU:N$6
  Top 0.305: MCU:U1.31 90.6,32.75 90.6,33.5 87.05,37.05 87.05,40.57 MCU:J5.3
MCU:N$7
  Top 0.406: MCU:BOOT0.2 95.81,39.81 94.65,38.65 94.65,37.67 MCU:R1.1
MCU:N$8  (1 unrouted)
  Top 0.3: MCU:U1.44 95.05,22.4 97.41,24.76 | MCU:R1.2 94.54,33.76 97.41,30.89
  Top 0.305: 97.41,24.76 97.41,25.29 97.1,25.6 96.9,25.88 96.76,26.02 96.76,29.18 97.41,29.78 97.41,30.89 97.03,31.28
MCU:N$9
  Top 0.305: MCU:U1.32 93.94,28.7 90,32.65 90,33.3 87.55,35.75 87.54,35.75 87.52,35.77 86.73,35.77 86.55,35.95 86.55,36.48 86.53,36.76 86.53,38.55 MCU:J5.2
MCU:N$10
  Top 0.406: MCU:BOOT1.2 95.71,44.69 97.1,43.3 97.1,38.13 MCU:R2.1
MCU:N$11  (via drill 0.35)
  Top 0.305: MCU:U1.20 100.25,29.75 101.3,30.8 101.85,31.3 102.75,31.3 v102.8,31.3 | v96.5,34.85 96.5,35.73 MCU:R2.2
  Bottom 0.305: v102.8,31.3 102.8,32.2 104.05,33.55 104.05,34.2 103.4,34.85 96.6,34.85 96.55,34.9 v96.5,34.85
MCU:N$12
  Top 0.305: MCU:U1.33 93.59,28.36 89.46,32.49 89.46,33.12 87.31,35.26 85.94,35.26 85.25,35.95 MCU:J5.1
MCU:N$14  (via drill 0.35)
  Top 0.305: MCU:U1.30 91.15,32.9 91.15,33.7 89.85,35 89.85,35.15 v89.9,35.2
  Bottom 0.305: v89.9,35.2 88.55,35.2 86.53,37.22 86.53,43.62 MCU:J5.4
MCU:N$15  (via drill 0.35)
  Top 0.305: MCU:U1.29 95,29.75 91.75,33 91.75,33.9 90.85,34.8 v90.85,35.75 | v90.85,35.75 90.85,35.9 v90.85,35.75
  Bottom 0.305: MCU:J5.5 86.53,46.17 89.13,46.17 90.85,44.45 v90.85,35.75
MCU:PA15
  Top 0.305: MCU:U1.38 92.88,24.48 92,23.6 91.15,23.6 89.5,25.25 89.5,27.55 86.85,30.2 86.8,31.9 85.2,33.5 85.02,33.5 MCU:GPIO.8
MCU:SPI1_MISO  (via drill 0.5)
  Top 0.3: MCU:J1.2 85.04,8.37 86.33,9.66 86.33,10.28 88.25,12.2 88.25,12.9 91.25,15.9 91.2,15.9 v91.15,15.95 | v99.5,27.05 100.05,27.6 100.95,27.6 101.65,28.3 MCU:U1.16 101.69,28.34 102.75,29.4 104.15,29.4 v104.5,29.6 104.5,29.75 | v104.5,39.05 104.5,40.65 104.05,41.1 MCU:U$1.2
  Bottom 0.3: v91.15,15.95 v91.15,15.96 90.09,17.02 90.09,18.98 97.81,26.7 98.85,26.7 99.3,27.15 99.4,27.15 v99.5,27.05 | v104.5,29.6 104.5,30.06 104.71,30.27 104.66,31.01 105.9,32.25 105.9,37.3 104.35,39 104.45,39 v104.5,39.05
MCU:SPI1_NSS  (via drill 0.5)
  Top 0.3: MCU:J1.4 85.04,12.84 91.1,18.9 v91.1,18.85 | 102.36,27.61 MCU:U1.14
  Top 0.305: MCU:U1.14 102.36,27.61 101.5,26.75 101.47,26.75 101.31,26.59 101.14,26.59 v100.85,26.3
  Bottom 0.3: v91.1,18.85 98.45,26.2 101,26.25 v100.85,26.3
MCU:SPI2_MISO
  Top 0.305: MCU:J6.2 90.21,39.8 92.38,37.63 92.38,34.8 92.89,34.29 92.89,33.28 MCU:U1.27
MCU:SPI2_MOSI
  Top 0.305: MCU:J6.1 91.24,37.26 91.87,36.63 91.87,34.59 92.38,34.08 92.38,33.07 95.35,30.11 MCU:U1.28
MCU:SPI2_NSS
  Top 0.305: MCU:J6.4 89.97,44.88 91.85,43 91.85,39.6 93.48,37.97 93.5,37.78 93.5,35.1 93.8,34.8 93.8,33.8 MCU:U1.25
MCU:SPI2_SCK
  Top 0.305: MCU:J6.3 90.11,42.34 91.34,41.11 91.34,39.39 92.99,37.74 92.99,37.15 93,36.86 93,34.9 93.4,34.5 93.4,33.5 96.07,30.83 MCU:U1.26
MCU:SWDCLK  (via drill 0.35, 0.5)
  Top 0.305: MCU:U1.37 92.53,24.83 91.9,24.2 91.5,24.2 91,24.7 91,25.05 v91.2,25.25
  Top 0.406: MCU:R4.1 102.04,48.79 v101.9,48.65
  Bottom 0.305: v91.2,25.25 91.2,28.66 89.67,30.2 89.67,30.36 89.61,30.44 89.62,30.5 89.6,30.54 89.63,30.61 89.67,30.8 89.69,30.82 89.69,30.86 89.74,30.89 89.76,30.93 89.83,30.96 90.1,31.23 90.31,31.23 93.43,34.25 93.44,34.25 93.45,34.26 93.82,34.27 97.49,37.94 98.98,37.94 99.46,38.41 99.46,39.91 101.95,42.4 101.95,48.6 v101.9,48.65
  Bottom 0.406: MCU:SWD.3 93.91,48.83 95.25,50.18 100.37,50.18 v101.9,48.65
MCU:SWDIO  (via drill 0.35, 0.5)
  Top 0.305: MCU:R3.2 98.66,37.41 97.65,36.4 97.65,34.9 96.5,33.75 96.35,33.75 v96.3,33.8 | v90.4,30.5 90.78,30.45 MCU:U1.34
  Top 0.406: MCU:R3.2 v98.66,38.74 v98.65,38.75
  Bottom 0.305: v96.3,33.8 93.65,33.75 90.5,30.7 90.15,30.55 v90.4,30.5
  Bottom 0.406: MCU:SWD.2 98.53,46.11 98.81,46.11 99.7,45.22 99.7,41.2 98.65,40.16 v98.65,38.75
MCU:USART2_CTS  (via drill 0.5)
  Top 0.3: MCU:U1.10 101.98,24.17 101.3,24.85 101.37,24.92 101.37,25.09 102.14,25.87 102.52,25.87 103.45,26.8 v103.6,26.65
  Bottom 0.305: v103.6,26.65 103.6,25.9 102.8,25.1 102.8,24.35 103.25,23.9 107.8,23.9 109.7,22 109.7,20.45 MCU:J3.4
MCU:USART2_RTS  (via drill 0.5)
  Top 0.3: MCU:U1.11 102.38,24.52 103,23.9 103.55,23.9 104.35,24.75 104.2,24.95 v104.2,24.9
  Bottom 0.3: v104.2,24.9 107.69,24.9 110.24,22.35 110.34,22.35 MCU:J3.3
MCU:USART2_RX
  Top 0.3: MCU:U1.13 102.73,27.28 103.4,27.95 105.8,27.95 106.7,28.85 108.92,28.85 MCU:J3.1
MCU:USART2_TX
  Top 0.3: MCU:J3.2 110.98,24.17 109.65,25.5 109.65,26.75 108.3,28.1 106.66,28.1 106.06,27.3 105.31,27.3 103.91,25.89 103.73,25.89 MCU:U1.12
N$1
  Top 0.4: J2.D-1 6.02,15.56 PCM2707:R4.2
N$2
  Top 0.4: J2.D+1 7.37,14.91 PCM2707:R3.2 7.61,13.25 PCM2707:R5.2
N$3  (3 unrouted)
N$4
  Top 0.406: AMPLIFIER:LOUT.1 30.12,42.04 J6.TIP J6.TIP-NORM
N$5
  Top 0.406: PCM2707:U$1.18 26.74,22.75 PCM1794A:R4.1
N$6  (via drill 0.35, 0.5)
  Top 0.406: PCM2707:U$1.5 25.14,15.79 27.9,18.55 27.95,18.55 29.15,19.75 29.15,21.25 29.15,21.3 29.6,21.75 30,21.75 30.4,22.15 30.4,25.5 30.55,25.65 30.6,25.65 v30.65,25.7 | v29.75,31.95 30.97,31.95 PCM1794A:R2.1
  Bottom 0.254: v30.65,25.7 30.65,27.8 29.25,29.2 29.25,31.5 29.7,31.95
  Bottom 0.406: 29.7,31.95 v29.75,31.95
N$7
  Top 0.406: PCM2707:U$1.19 25.94,21.21 24.8,22.35 24.8,22.86 PCM1794A:R3.1
N$8
  Top 0.406: PCM2707:U$1.17 27.54,20.79 28.85,22.1 28.85,22.81 PCM1794A:R1.1
N$9
  Top 0.406: J6.RING J6.RING-NORM 18.19,53.34 19.95,55.1 26.9,55.1 30.4,51.6 30.4,44.12 AMPLIFIER:ROUT.1
N$10  (3 unrouted)
N$11  (via drill 0.5)
  Top 0.305: MCU:GPIO.7 88.99,26.91 88.99,25.04 90.94,23.09 92.21,23.09 93.24,24.12 MCU:U1.39
  Top 0.406: R1.1 56.4,7.07 J3.2 56.42,5.78 57.9,4.3 75.6,4.3 v77.75,6.45
  Bottom 0.305: 87,5.1 87,6.96 86.88,7.08 86.88,25.9 85.74,27.04 84.41,27.04 83.65,27.8 83.65,29.59 MCU:GPIO.7
  Bottom 0.406: v77.75,6.45 79.48,6.45 80.42,7.39 81.58,7.39 83.69,5.28 83.69,4.56 84.48,3.77 85.6,3.77 86.92,5.1 87,5.1
N$12  (via drill 0.5)
  Top 0.305: MCU:GPIO.1 86.48,15.68 90.54,19.74 93.81,19.74 95.71,21.64 MCU:U1.46 | J3.3 58.96,5.79 59.89,4.86 75.02,4.86 78.56,8.41 81.46,8.41 82.55,9.5 83.25,10.2 83.25,10.25 v83.15,12.75
  Top 0.406: J3.3 58.96,9.05 R2.1
  Bottom 0.305: v83.15,12.75 83.1,13.8 MCU:GPIO.1
N$13
  Top 0.305: MCU:U1.45 95.36,22.01 94.3,20.95 93.59,20.95 92.89,20.25 87.01,20.25 MCU:GPIO.2 83.55,16.79 83.55,14.5 74.9,5.85 62.85,5.85 61.65,7.05 J3.4
  Top 0.406: R3.1 61.45,7.1 J3.4
N$14  (3 unrouted)
N$15  (3 unrouted)
PCM1794A:BCK_INT  (via drill 0.35)
  Top 0.406: PCM1794A:U$1.6 31.64,28.05 31.2,27.6 27.54,27.6 PCM1794A:J1.2 | PCM1794A:R3.2 24.83,25.87 23.9,26.8 23.85,26.8 v23.8,26.75
  Bottom 0.406: v23.8,26.75 24.55,26.75 25.35,27.55 25.35,29.71 PCM1794A:J1.2
PCM1794A:DATA_INT  (via drill 0.35)
  Top 0.406: PCM1794A:U$1.5 31.45,28.7 31.1,28.35 29.33,28.35 PCM1794A:J1.3 | PCM1794A:R1.2 28.88,25.83 v28.9,25.85
  Bottom 0.406: v28.9,25.85 28.9,28.78 PCM1794A:J1.3
PCM1794A:LRCK_INT
  Top 0.406: PCM1794A:U$1.4 34.51,29.34 34.05,29.8 | 34.05,29.8 34.05,31.45 33.55,31.95 32.81,31.95 PCM1794A:R2.2 | PCM1794A:J1.4 34,29.75 34.05,29.8
PCM1794A:MUTE
  Top 0.406: PCM1794A:R8.2 39.58,23.17 37.35,25.4 37.2,25.4 37.2,25.41 36.33,25.41 PCM1794A:U$1.10
PCM1794A:N$4  (via drill 0.5)
  Top 0.406: PCM1794A:R6.1 v46.91,22.26 v46.9,22.25 | v46.9,22.25 46.85,22.2 v46.9,22.25 | v41.55,26.1 PCM1794A:U$1.20
  Bottom 0.406: v46.9,22.25 42.35,22.25 41.6,23 41.6,26.1 v41.55,26.1
PCM1794A:N$9
  Top 0.406: PCM1794A:U$1.22 45.76,27.39 46.15,27 PCM1794A:C7.-
PCM1794A:N$10  (via drill 0.5)
  Top 0.406: PCM1794A:U$1.21 42.12,26.75 41.91,26.96 40.99,26.96 40.85,27.1 40.85,27 v40.9,26.95 | v38.05,35.25 37.95,35.25 37.5,35.7 PCM1794A:C8.-
  Bottom 0.406: v40.9,26.95 40.75,26.95 39.55,28.15 39.55,33.8 38.1,35.25 v38.05,35.25
PCM1794A:SCK_INT
  Top 0.406: PCM1794A:U$1.7 32.05,27.39 31.45,26.8 26.75,26.8 | 26.75,26.8 25.8,26.8 PCM1794A:J1.1 | PCM1794A:R4.2 26.83,26.72 26.75,26.8
PCM2707:INT_3.3V  (via drill 0.35)
  Top 0.406: PCM2707:U$1.10 27.92,13.33 27.7,13.55 27.1,13.55 26.1,14.55 26.1,15.75 27.8,17.45 27.8,17.65 28.25,18.1 29,18.1 PCM2707:U$1.16 | PCM2707:U$1.21 24.34,20.86 22.9,22.3 22.9,22.75 22.65,23 PCM2707:C7.2
  Top 0.508: 19.45,8.2 v19.55,8.1 20.36,7.29 PCM2707:C5.+ 21.5,7.26 21.5,8.05 22.74,9.29 PCM2707:U$1.2 22.74,11.94 23.4,12.6 23.9,12.6 24.2,12.9 v24.2,16.5 24.2,16.54 | v15.75,16.95 16.2,16.35 16.3,16.1 PCM2707:R6.1 14.39,15.96 PCM2707:U$2.2 | PCM2707:U$1.16 30.12,18.13 30.4,17.85 30.55,17.85 v30.6,17.8 | PCM2707:U$1.21 24.34,18.89 v23.65,18.2
  Bottom 0.508: v19.55,8.1 16.25,11.3 16.15,16.45 16.15,16.55 v15.75,16.95 | v30.6,17.8 30.5,17.8 30.2,18.1 23.75,18.1 v23.65,18.2 | v23.65,18.2 23.6,18.25 | v23.65,18.2 23.65,17.05 v24.2,16.5
PCM2707:INTRNL_D+
  Top 0.406: PCM2707:U$1.23 22.74,20.41 22.05,21.1 19.45,21.1 14.35,26.2 12.75,26.2 12.1,25.55 12.1,17.15 10.05,15.1 9.46,15.1 PCM2707:R3.1
PCM2707:INTRNL_D-
  Top 0.406: PCM2707:U$1.22 23.54,20.76 22.4,21.9 19.65,21.9 14.4,27.15 12.55,27.15 11,25.6 11,17.9 10.35,17.25 9.51,17.25 PCM2707:R4.1
PCM2707:INTRNL_HOST
  Top 0.406: PCM2707:R2.2 23.68,9.92 23.55,10.05 23.55,11.03 PCM2707:U$1.3
PCM2707:N$2
  Top 0.305: PCM2707:C4.2 18.96,17.29 19.7,16.55 20.43,16.55 20.48,16.5
  Top 0.406: PCM2707:U$1.30 19.19,14.13 PCM2707:C1.1
  Top 0.508: PCM2707:U$1.30 21.43,14.13 21.95,14.65 21.95,16.2 21.65,16.5 20.48,16.5 PCM2707:U$1.27
PCM2707:N$9
  Top 0.4: PCM2707:R5.1 11.05,13.2 12.15,14.3 12.15,15.07 PCM2707:U$2.3
PCM2707:RESONATOR_XTI
  Top 0.4: PCM2707:U$1.12 29.1,15 30.4,15 30.85,14.55 31.26,14.14 PCM2707:X1.1 33.84,14.14 34.15,14.45 35.31,14.45 PCM2707:R1.1
PCM2707:RESONATOR_XTO
  Top 0.4: PCM2707:U$1.13 30.33,15.73 31.2,16.6 32.4,16.6 | 32.4,16.6 PCM2707:X1.3 | PCM2707:R1.2 34.18,16.27 33.75,16.7 PCM2707:X1.3 32.4,16.6
PCM2707:VCOM
  Top 0.406: PCM2707:C6.+ 11.66,10.74 13.35,8.95 15.95,8.95 19.4,12.5 20.42,12.5 PCM2707:U$1.32
PULLUP_D+  (via drill 0.5)
  Top 0.305: MCU:U1.42 94.3,23.1 92.6,21.4 88.65,21.4 v88.2,21.85 86.8,23.25 85.03,23.25 MCU:GPIO.4
  Top 0.406: J4.1 14.43,14.02 PCM2707:U$2.1 PCM2707:R6.2
  Bottom 0.305: v88.2,21.85 88.6,21.45 88.6,6.8 88.65,6.75 88.65,4.25 86.4,2 84.05,2 82.05,4 82,4
  Bottom 0.406: 82,4 36.51,4 35.8,3.29 22.94,3.29 J4.1
SPI_MOSI  (via drill 0.5)
  Top 0.3: MCU:J1.1 89.47,5.12 90.75,6.4 90.75,14.05 90.7,14.1 v90.8,14.1 | v98.4,27.4 99.05,28.05 100.7,28.05 101.3,28.65 MCU:U1.17 102.6,30 103.1,30 v103.7,30.4 | v101.75,36.1 102.71,36.1 MCU:U$1.5
  Top 0.406: PCM2707:U$1.8 27.55,11.03 27.55,10 27.95,9.6 29,9.6 30.76,7.84 J1.1 30.76,4.54 32.4,2.9 77.4,2.85 78.6,4.05 84.02,4.1 MCU:J1.1
  Bottom 0.3: v90.8,14.1 90.8,15.16 89.59,16.37 89.59,19.19 97.6,27.21 97.96,27.21 98.25,27.5 98.3,27.5 v98.4,27.4 | v103.7,30.4 103.7,30.66 105.41,32.42 105.41,34.88 104.98,35.36 102.49,35.36 v101.75,36.1 101.7,36.15
  Bottom 0.406: 30.86,7.7 J1.1
SPI_SCK  (via drill 0.35)
  Top 0.305: v92.05,18.1 92,18.15 91.9,18.15 87.4,13.65 87.4,12.65 85.04,10.29 MCU:J1.3 83.97,10.2 81.67,7.9 80.6,7.9 76.16,3.46 34.69,3.46 v32.75,5.4 32.65,5.5 | v99.14,25.44 100.05,26.35 100.05,26.5 100.65,27.1 101.1,27.1 101.99,27.99 MCU:U1.15 102.04,27.99 102.65,28.6 105.1,28.6 105.7,29.2 105.7,29.25 v105.75,29.3 | MCU:U$1.6 103.39,37.34 v103.5,37.45 | J1.2 28.22,7.93
  Top 0.406: 28.22,7.93 26.75,9.4 26.75,11.03 PCM2707:U$1.7
  Bottom 0.305: v92.05,18.1 92.05,18.35 v99.14,25.44 99.2,25.5 | J1.2 28.22,7.33 30.2,5.35 32.7,5.35 v32.75,5.4 | v105.75,29.3 105.95,29.5 107.6,29.5 108.36,30.26 108.36,35.37 106.41,37.51 106.27,37.65 105.3,38.71 105.31,38.72 105.31,39.38 104.83,39.86 104.17,39.86 103.69,39.38 103.69,37.64 v103.5,37.45 103.4,37.35
TP  (via drill 0.5)
  Top 0.55: 40.5,50.9 v40.45,50.85 | 40.45,49.1 v40.35,49 | 38.2,49 v38.05,49.15 | 38.05,50.8 v38.1,50.85
  other vias: 43.2,50.9 43.2,48.95
  pour Bottom: 34.2,52.1 34.15,47.45 35.5,46.1 45.6,46.1 46.95,47.45 46.95,52.4 45.65,53.7 35.55,53.7 34.15,52.3 34.15,52.15
USB+5V  (via drill 0.35, 0.5)
  Top 0.4: J2.VBUS1 4.51,16.21
  Top 0.406: PCM2707:U$1.24 21.83,19.62 v21.2,20.25 | PCM2707:C3.+ 14,19.2 16,21.2 16.05,21.2 v16.1,21.25 | PCM2707:R2.1 21.82,3.13 22.65,2.3 25.05,2.3 25.55,2.8 25.55,3.56 PCM2707:R_CS.2
  Top 0.508: PCM2707:C2.2 13.95,10.3 13.87,10.3 13.08,11.09 13.08,12.5 | 13.08,12.5 13.08,13.87 13.25,14.03 13.25,18.86 PCM2707:C3.+ | PCM2707:R2.1 16.18,3.97 14.4,5.75 14.25,5.75 v14.2,5.8 | v11.9,12.4 12.98,12.4 13.08,12.5
  Top 0.55: U$1.1 37.85,8.58 37.85,7.05 38.31,6.59 C1.1 v37.3,5.65 | 4.51,16.21 7.2,18.9 7.2,23.05 12.1,27.95 15.15,27.95 18.65,24.45 19.38,24.45 D1.A 19.45,23.7 20.15,23 20.25,23 v20.3,22.95 | v27.6,4.15 27.55,4.4
  Bottom 0.305: v20.3,22.95 19.85,22.95
  Bottom 0.406: 16.2,21.25 v16.1,21.25 | 21.3,20.4 21.15,20.25 v21.2,20.25
  Bottom 0.508: v14.2,5.8 13,5.8 11.9,6.9 11.9,12.3 11.95,12.35 v11.9,12.4 | v16.1,21.25 18.6,21.25 v20.3,22.95 | v21.2,20.25 20.3,20.25
  Bottom 0.55: v20.3,22.95 20.3,20.25 20.3,8.8 23.4,5.7 26,5.7 27.6,4.1 v27.6,4.15 35.8,4.15 v37.3,5.65
V+  (via drill 0.35)  (4 unrouted)
  Top 0.406: PCM1794A:U$1.23 40.24,28.05 40.2,28 | PCM1794A:C9.+ 54.46,41.84 52.4,43.9 52.4,45.5 AMPLIFIER:C11.2
  Top 0.508: AMPLIFIER:C12.+ 21,36.15 22.5,34.65 19.87,32.02 J5.1 17.97,29.15 D2.C 19.45,27.14 D1.C
  Top 0.55: 19.45,27.23 D1.C | 22.5,34.65 24.2,36.35 30.55,36.35 33.95,39.75 37.7,39.75 37.95,40 | 37.95,40 38,40.05 AMPLIFIER:C9.1 | AMPLIFIER:C9.1 38,42.85 37.5,43.35 37.5,44.9 37.45,44.95 | 37.45,44.95 AMPLIFIER:U$1.3 | AMPLIFIER:C9.1 38,41.2 39.2,42.4 46.8,42.4 PCM1794A:C3.+ 54.43,41.59 PCM1794A:C9.+ | AMPLIFIER:C10.1 37.41,55.8 AMPLIFIER:U$1.18 37.41,52.55 36.3,51.45 36.3,47.5 37.45,46.35 37.45,44.95 | PCM1794A:C4.1 45.95,31.3 PCM1794A:U$1.28 42.15,31.3 | LM2662:C1.+ 51.32,15.81 PCM1794A:C5.+ 56.24,15.81 59.9,12.15 62.05,12.15 62.75,12.85 LM2662:U$1.8 | PCM1794A:C6.2 43.89,21.56 43.5,21.95 43.5,22.81 | 43.5,22.81 PCM1794A:U$1.15 | 43.5,22.81 43.42,22.89 42.62,22.89 42.6,22.9 41.65,22.9 41.41,23.14 41.41,23.25 39.8,24.86 39.8,27.6 40.2,28 39.85,28.36 39.85,30.6 40.55,31.3 42.15,31.3 | 42.15,31.3 42.29,31.43 PCM1794A:C8.+ | 37.95,40 37.95,39.6 38.9,38.65 41.25,38.65 42.25,37.65 42.25,36.73 | v69.85,48 68.6,48 AMPLIFIER:C6.1 | v57,41 56.44,41.56 PCM1794A:C9.+ | AMPLIFIER:IC1.4 60.99,44.01 61.65,43.35 61.65,41 61.6,40.95 v61.6,41 | PCM1794A:C9.+ 54.49,41.56 54.55,41.5
  Bottom 0.55: v57,41 v61.6,41 63.19,41 63.52,40.72 65.43,40.72 67.11,42.4 66.86,42.21 70,45.35 70.05,47.75 69.85,47.95 v69.85,48
V-  (via drill 0.35, 0.5)  (3 unrouted)
  Top 0.406: AMPLIFIER:C13.1 55.95,55.7 56.55,56.3 60.25,56.3 v61.7,54.85
  Top 0.55: AMPLIFIER:C5.1 31.25,55.67 AMPLIFIER:C8.1 32.86,55.6 33.65,55.6 34.26,54.99 AMPLIFIER:U$1.20 v34.81,53.1 AMPLIFIER:U$1.1 | AMPLIFIER:C7.1 67.03,56.22 62.77,56.22 62.76,56.15 62.75,56.1 v61.7,54.85 61.04,54.19 AMPLIFIER:IC1.11 | 60.48,18.86 60.5,18.85 60.45,18.85 v60.4,18.9 | LM2662:U$1.5 68.08,15.53 v68.2,15.65
  Bottom 0.55: v60.4,18.9 60.4,17.6 62.4,15.6 68.15,15.6 v68.2,15.65 | v61.7,54.85 36.6,54.85 34.85,53.1 34.85,53.23 v34.81,53.1
ZCEN
  Top 0.305: MCU:GPIO.5 86.75,25.84 90.55,22.04 92.56,22.04 93.94,23.43 MCU:U1.41
ZERO  (via drill 0.5)
  Top 0.406: R1.2 52.83,10.9 51.26,12.47 46.63,12.47 45.55,13.55 45.5,13.55 v45.45,13.6 | v38.1,23.5 PCM1794A:U$1.13
  Bottom 0.406: v45.45,13.6 37.35,13.6 36.75,14.2 36.75,16.05 35.1,17.7 35.1,18.27 36.3,19.46 36.3,19.75 36.85,20.3 36.85,22.3 38,23.45 38.05,23.45 v38.1,23.5